# Altium PCB SignalAnalyse.PcbDoc (part 2 of 3)
Units mil, origin at the board's own origin, x right, y up, seen from the top; angles counter-clockwise.
Board outline 4204.03 x 1800 mil, 2 copper layers (Top Layer, Bottom Layer); 94 components, 52 nets, 372 pads, 56 vias.
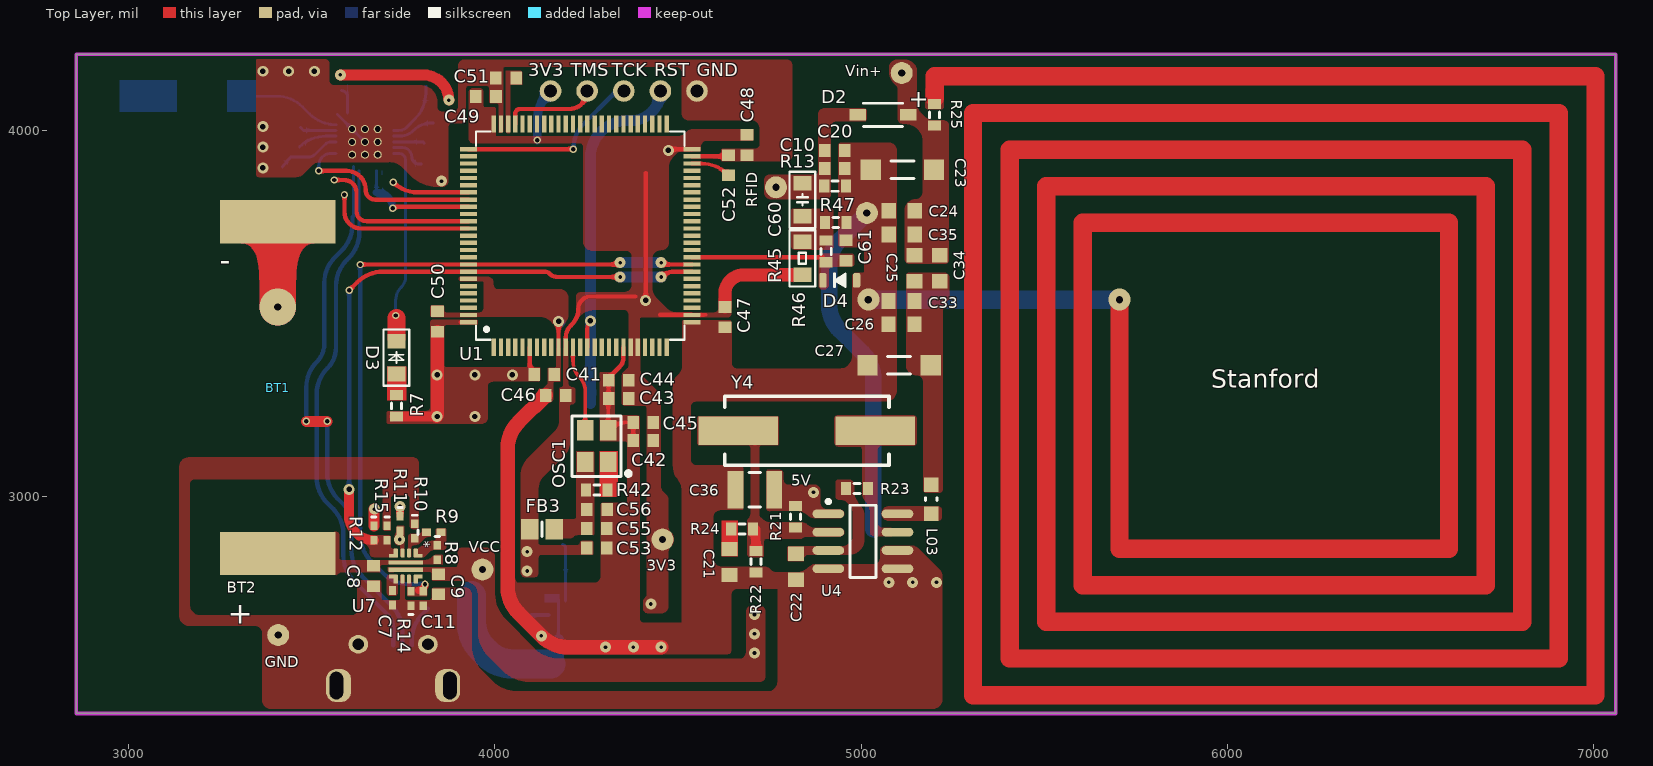
[diagram p0: Top Layer view]

## Polygon pours and split planes (outlines as drawn) (continued)
Vcc_un on Top Layer "Top Layer-Vcc_un" (solid, pour order 102): 3708,2806 3891,2806 ccw(c3891,2814) 3899,2814 3899,2851 cw(c3908,2851) 3908,2860 3973,2860 cw(c3973,2833) 4000,2833 4000,2734.42 ccw(c4100,2734.42) 4029.29,2663.71 4107.71,2585.29 ccw(c4178.42,2656) 4178.42,2556 4668,2556 ccw(c4668,2574) 4686,2574 4686,2685 cw(c4701,2685) 4701,2700 4724,2700 cw(c4724,2685) 4739,2685 4739,2508 cw(c4725,2508) 4725,2494 4092.42,2494 cw(c4092.42,2594) 4021.71,2523.29 3981,2564 cw(c4043.77,2626.77) 3955,2626.77 3955,2727.86 ccw(c3913.86,2727.87) 3913.86,2769 3833,2769 cw(c3833,2775) 3827,2775 3827,2788 ccw(c3822,2788) 3822,2793 3708,2793
3.3V on Top Layer "Top Layer-3.3V 2" (solid, pour order 160): 4119,2832 cw(c4127,2832) 4127,2840 4264,2840 ccw(c4264,2845) 4269,2845 4269,2874 ccw(c4265,2874) 4265,2878 4238,2878 ccw(c4238,2872) 4232,2872 cw(c4227,2872) 4227,2867 4123,2867 cw(c4123,2871) 4119,2871 4119,3022 cw(c4167.78,3020.79) 4134.14,3056.14 4190.56,3112.56 ccw(c4158.13,3145) 4204,3145 4204,3244 cw(c4212,3244) 4212,3252 ccw(c4212,3259) 4219,3259 4219,3292 ccw(c4213,3292) 4213,3298 cw(c4213,3311) 4200,3311 4200,3424 4187,3424 4187,3305 cw(c4180,3305) 4180,3298 4179,3298 ccw(c4179,3295) 4176,3295 4176,3207 cw(c4137.38,3207) 4164.69,3179.69 4162.5,3176.5 4091.51,3105.51 ccw(c4141.01,3056) 4071,3056 4071,2791 ccw(c4083,2791) 4083,2779 4107,2779 ccw(c4107,2791) 4119,2791
NetC55_1 on Top Layer "NETC55_1_L01_P022" (solid, remove dead copper, pour order 22): 4202.93,2885 ccw(c4202.93,2902.07) 4215,2890 cw(c4224.66,2880.34) 4224.66,2894 4268,2894 ccw(c4268,2897) 4271,2897 4271,3120 ccw(c4268,3120) 4268,3123 4224,3123 ccw(c4224,3121) 4222,3121 4222,2945 cw(c4214,2945) 4214,2937 4171.21,2937 ccw(c4171.21,2926.79) 4161,2926.79 4161,2894 ccw(c4170,2894) 4170,2885
GND on Top Layer "Top Layer-GND 7" (solid, pour order 174): 4510,4159 ccw(c4496,4159) 4496,4173 4029,4173 ccw(c4029,4166) 4022,4166 4022,4153 cw(c4019,4153) 4019,4150 3985,4150 3985,4176 cw(c4001,4176) 4001,4192 4799,4192 cw(c4799,4179) 4812,4179 4812,3930 cw(c4797,3930) 4797,3915 4622,3915 cw(c4622,3919) 4618,3919 ccw(c4614,3919) 4614,3923 4596,3923 4596,3934 4608,3934 ccw(c4608,3944) 4618,3944 cw(c4624,3944) 4624,3950 4713,3950 ccw(c4713,3960) 4723,3960 4723,4007 ccw(c4703,4007) 4703,4027 4530,4027 cw(c4530,4047) 4510,4047
3.3V on Top Layer "Top Layer-3.3V 3" (solid, pour order 172): 4365.02,3531 ccw(c4356.02,3531) 4356.02,3540 4352,3540 4352,3552 4425,3552 cw(c4425,3548) 4429,3548 4429,3512 ccw(c4439,3512) 4439,3502 4599,3502 ccw(c4599,3513) 4610,3513 4610,3530 cw(c4646,3530) 4646,3566 4646,3498 cw(c4637,3498) 4637,3489 4400,3489 ccw(c4400,3485) 4396,3485 4396,3427 4365.02,3427
GND on Top Layer "Top Layer-GND 6" (solid, pour order 170): 4512,3356.3 cw(c4479.89,3356.3) 4502.6,3333.6 ccw(c4506.45,3337.45) 4506.45,3332 4661,3332 4661,3349 cw(c4661,3363) 4647,3363 4647,3475 ccw(c4641,3475) 4641,3481 4516,3481 ccw(c4516,3477) 4512,3477
no net on Top Layer "Top Layer-No Net 2" (solid, pour order 166): 3735,3202
3.3V on Top Layer "Top Layer-3.3V 1" (solid, pour order 162): 4474,2845 cw(c4500.56,2845) 4481.78,2863.78 4482,2864 ccw(c4467.51,2878.49) 4488,2878.49 4488,2885.1 ccw(c4464.1,2885.1) 4481,2902 cw(c4497.9,2918.9) 4474,2918.9 4474,2921 4474,2990 ccw(c4454.69,2990) 4468.34,3003.66 4458.66,3013.34 cw(c4472.31,3027) 4453,3027 4453,3260.61 ccw(c4408.62,3260.62) 4440,3292 4407.61,3324.39 cw(c4433.21,3350) 4397,3350 4397,3431 4365,3431 4365,3358 cw(c4352.93,3358) 4361.46,3349.46 4350.54,3338.54 ccw(c4359.07,3330) 4347,3330 4347,3255 ccw(c4355,3255) 4355,3247 4407,3247 cw(c4407,3239) 4415,3239 4415,2735 cw(c4398.1,2735) 4410.05,2723.05 4409,2722 ccw(c4418.66,2712.34) 4405,2712.34 4405,2692.24 ccw(c4415.24,2692.24) 4408,2685 ccw(c4417.66,2694.66) 4417.66,2681 4455,2681 ccw(c4455,2700) 4474,2700
GND on Top Layer "Top Layer-GND 3" (solid, pour order 140): 4200,3544 ccw(c4179,3544) 4179,3565 4010,3565 cw(c4010,3579) 3996,3579 3996,3584 ccw(c3980,3584) 3980,3600 3941,3600 3904,3600 ccw(c3904,3597) 3901,3597 3901,3591 ccw(c3904,3591) 3904,3588 3964,3588 cw(c3964,3583) 3969,3583 3969,3513 cw(c3958,3513) 3958,3502 3867,3502 cw(c3867,3507) 3862,3507 3862,3519 ccw(c3859,3519) 3859,3522 3826,3522 ccw(c3826,3519) 3823,3519 3823,3492 ccw(c3826,3492) 3826,3489 4126.86,3489 cw(c4126.86,3454.86) 4151,3479 4158.1,3471.9 cw(c4134.2,3448) 4168,3448 4180,3448 cw(c4213.8,3448) 4189.9,3471.9 4191.51,3473.51 ccw(c4171.03,3494) 4200,3494
GND on Top Layer "Top Layer-GND 4" (solid, pour order 138): 4150,3257 ccw(c4150,3266) 4159,3266 4159,3308 cw(c4164,3308) 4164,3313 4176,3313 ccw(c4176,3317) 4180,3317 4180,3431 4168,3431 4168,3357 cw(c4162,3357) 4162,3351 4148,3351 ccw(c4148,3347) 4144,3347 4144,3310 cw(c4136.76,3310) 4141.88,3304.88 4133.83,3296.83 cw(c4127,3303.66) 4127,3294 4123,3294 ccw(c4123,3290) 4119,3290 4119,3261 ccw(c4123,3261) 4123,3257
GND on Top Layer "Top Layer-GND 5" (solid, pour order 136): 3348,4191 cw(c3351,4191) 3351,4194 3537,4194 cw(c3537,4184) 3547,4184 3547,4138 ccw(c3562,4138) 3562,4123 3797,4123 cw(c3797,4078) 3842,4078 3842,4064 ccw(c3855,4064) 3855,4051 3885,4051 ccw(c3885,4066) 3900,4066 3900,4178 cw(c3914,4178) 3914,4192 4001,4192 cw(c4001,4170) 4023,4170 4023,3993 4010,3993 4010,4069 ccw(c4006,4069) 4006,4073 3989,4073 cw(c3989,4077) 3985,4077 3985,4113 ccw(c3976,4113) 3976,4122 3929,4122 ccw(c3929,4114) 3921,4114 3921,4029 cw(c3912.03,4028.99) 3920.54,4026.15 cw(c3913.69,4025.84) 3914,4019 3884,4019 ccw(c3884,4007) 3872,4007 3872,3859 cw(c3859,3859) 3859,3846 3841.42,3846 cw(c3841.42,3946) 3770.71,3875.29 3749.26,3896.74 ccw(c3710,3857.48) 3710,3913 3522,3913 ccw(c3522,3884.03) 3501.51,3904.51 3478,3881 cw(c3453.86,3905.14) 3453.86,3871 3356,3871 cw(c3356,3879) 3348,3879
ADC on Top Layer "Top Layer-ADC" (solid, pour order 130): 4885,3641 ccw(c4879,3641) 4879,3647 cw(c4879,3650) 4876,3650 4876,3659 4880.95,3659 ccw(c4881.13,3669.05) 4888.11,3661.82 cw(c4892,3656) 4892,3663 4974,3663 cw(c4974,3656) 4981,3656 4981,3634 cw(c4974,3634) 4974,3627 4923,3627 ccw(c4923,3616) 4912,3616 4912,3577 cw(c4901,3577) 4901,3566 4892,3566 cw(c4892,3573) 4885,3573
RFID on Top Layer "Top Layer-RFID" (solid, pour order 128): 4905,3812 ccw(c4905,3825) 4918,3825 4918,4011 cw(c4931,4011) 4931,4024 5009,4024 ccw(c5009,4031) 5016,4031 5016,4053 ccw(c5009,4053) 5009,4060 4900,4060 ccw(c4900,4043) 4883,4043 4883,3888 cw(c4873,3888) 4873,3878 4749,3878 ccw(c4749,3865) 4736,3865 4736,3830 ccw(c4754,3830) 4754,3812
GND on Top Layer "Top Layer-GND 1" (solid, pour order 126): 5226,4113 5226,4063 cw(c5220,4063) 5220,4057 5182,4057 cw(c5182,4063) 5176,4063 5176,4113
Vin+ on Top Layer "Top Layer-Vin+" (solid, pour order 124): 5101,4109 ccw(c5084.1,4109) 5096.05,4120.95 5091.14,4125.86 cw(c5125.28,4160) 5077,4160 5077,4172 cw(c5097,4172) 5097,4192 5123,4192 cw(c5123,4165.44) 5141.78,4184.22 5145,4181 cw(c5128.1,4164.1) 5152,4164.1 5152,4075.63 ccw(c5192.14,4075.63) 5163.76,4047.24 5173.39,4037.61 ccw(c5199,4063.21) 5199,4027 5225,4027 cw(c5225,4012) 5240,4012 5240,3644 cw(c5231,3644) 5231,3635 5132,3635 cw(c5132,3647) 5120,3647 5120,3784 cw(c5147,3784) 5147,3811 ccw(c5147,3833) 5169,3833 5169,3969 ccw(c5121,3969) 5121,4017 5116,4017 cw(c5116,4032) 5101,4032
NetC25_2 on Top Layer "Top Layer-NetC25_2" (solid, pour order 122): 5177,3010 cw(c5177,3017) 5170,3017 5170,3311 ccw(c5150,3311) 5150,3331 cw(c5150,3358) 5123,3358 5123,3603 cw(c5130,3603) 5130,3610 5229,3610 cw(c5229,3598) 5241,3598 5241,3545.07 cw(c5223.93,3545.07) 5236,3533 ccw(c5267.38,3501.62) 5223,3501.62 5223,3019 cw(c5214,3019) 5214,3010
NetL03_1 on Top Layer "Top Layer-NetL03_1" (solid, pour order 120): 5056,2952 ccw(c5075,2952) 5075,2933 5211,2933 ccw(c5211,2942) 5220,2942 5220,2963 ccw(c5210,2963) 5210,2973 5077,2973 ccw(c5077,2952)
NetR21_1 on Top Layer "Top Layer-NetR21_1" (solid, pour order 118): 4849.24,2890 ccw(c4849.24,2879.76) 4842,2887 cw(c4834.76,2894.24) 4834.76,2884 4742,2884 ccw(c4742,2877) 4735,2877 4735,2839 cw(c4730,2839) 4730,2834 4698,2834 cw(c4698,2843) 4689,2843 4689,2930.34 cw(c4702.66,2930.34) 4693,2940 ccw(c4678.51,2954.49) 4699,2954.49 4699,3130 ccw(c4690,3130) 4690,3139 4559,3139 cw(c4559,3145) 4553,3145 4553,3214 cw(c4558,3214) 4558,3219 4771,3219 cw(c4771,3215) 4775,3215 4775,3143 cw(c4771,3143) 4771,3139 4729,3139 ccw(c4729,3132) 4722,3132 4722,2951.66 ccw(c4735.66,2951.66) 4726,2942 4727,2941 ccw(c4755.97,2969.97) 4755.97,2929 4838.51,2929 cw(c4838.51,2908.51) 4853,2923 ccw(c4874.73,2944.73) 4874.73,2914 4942,2914 cw(c4942,2902) 4954,2902 cw(c4942,2902) 4942,2890
VCC_5_RF on Top Layer "Top Layer-VCC_5_RF" (solid, pour order 116): 4908.5,2964 cw(c4908.5,2984.5) 4888,2984.5 4888,3018 ccw(c4875,3018) 4875,3031 4804,3031 cw(c4803.5,3046.5) 4788,3046 4788,3062 ccw(c4777,3062) 4777,3073 4747,3073 ccw(c4747,3067) 4741,3067 4741,2970 ccw(c4752,2970) 4752,2959 4827.03,2959 cw(c4827.03,2918.03) 4856,2947 ccw(c4872.9,2963.9) 4872.9,2940 4942,2940 ccw(c4942,2952) 4954,2952 ccw(c4942,2952) 4942,2964
no net on Top Layer "NONET_L01_P074" (solid, remove dead copper, pour order 74): 5088,2560